# Altium PCB PowerDistribution.PcbDoc (part 3 of 3)
Units mm, origin at the board's own origin, x right, y up, seen from the top; angles counter-clockwise.
Board outline 120 x 100 mm, 4 copper layers (Component Side, Ground, Power, Solder Side), stack 0.844 mm thick; 193 components, 120 nets, 734 pads, 6 vias.
Unrouted connection lines stored in the file: 508.
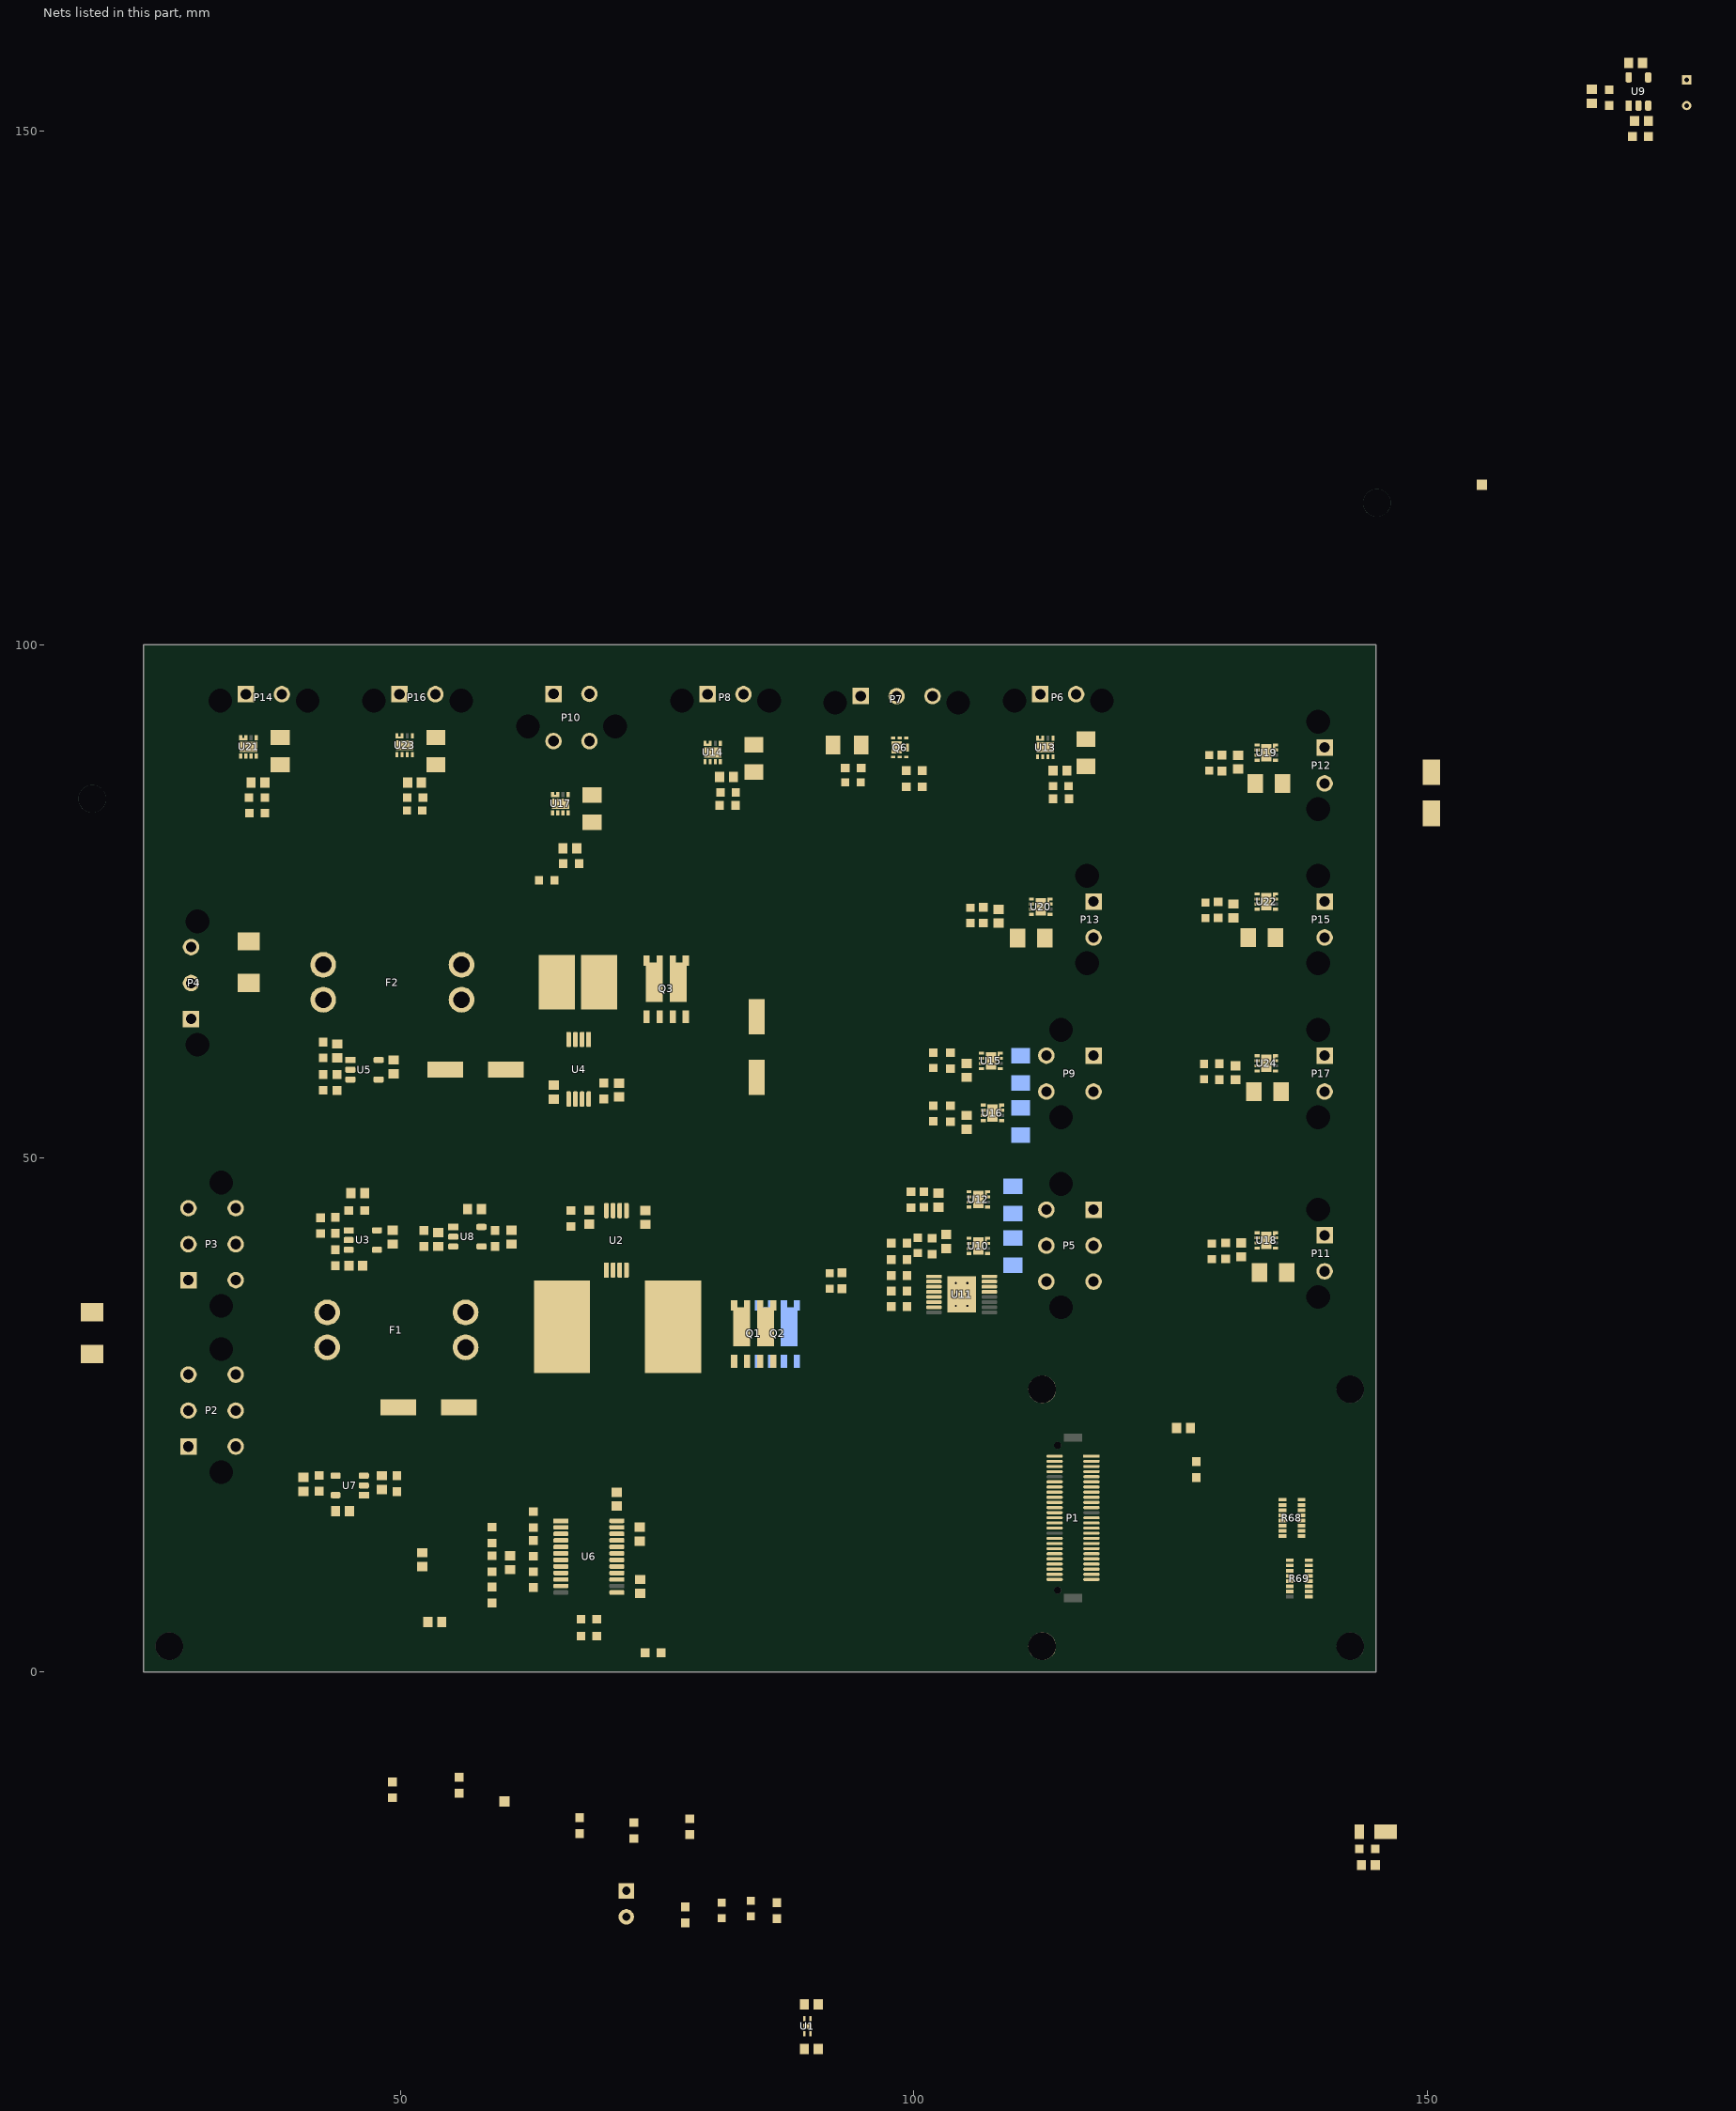
[diagram p2: the nets of this part, all layers, seen from the top]

## Part data (continued)
U11: library part "IC DVR HIGH-SIDE 1CH POWERSSO-16", "IC, High Side Drive, 4V - 28V, 24A, 40 mOhm", Manufacturer 1=STMicroelectronics, Manufacturer Part Number 1=VN7040AJTR, Max Operating Temperature=150°C, Max Output Current=24A, Min Operating Temperature=-40°C, Supplier Part Number 1=497-15853-1-ND, ComponentLink1Description=http://www.mouser.com/ds/2/389/vn7040aj-957413.pdf, ComponentLink1URL=http://www.mouser.com/ds/2/389/vn7040aj-957413.pdf, ComponentLink2Description=http://www.st.com/content/ccc/resource/technical/document/datasheet/5f/e6/42/6c/dc/d9/4c/65/DM00157100.pdf/files/DM00157100.pdf/jcr:content/translations/en.DM00157100.pdf, ComponentLink2URL=http://www.st.com/content/ccc/resource/technical/document/datasheet/5f/e6/42/6c/dc/d9/4c/65/DM00157100.pdf/files/DM00157100.pdf/jcr:content/translations/en.DM00157100.pdf, Description 1="ABD VIPOWER", Fault Protection="Over Voltage,Over Temperature", Interface=On/Off, Lead Free="Lead Free", Number of Outputs=1, Number of Pins=16, Packaging="Tape and Reel", Pricing 1="1=1.82, 10=1.638, 100=1.3165, 500=1.0816, 1000=0.8962 (USD)", Stock 1=1308, Supplier 1=Digi-Key

## Free pads (board coordinates)
  round 2.7 hole 2.7: ""(20,85) ""(27.5,2.5) ""(112.5,2.5) ""(112.5,27.5) ""(142.5,2.5) ""(142.5,27.5) ""(145.078,113.809)

## Via types
v1: diameter 0.5, hole 0.2, Component Side to Solder Side, 6 vias

## Nets (pads, with @x,y where several pads share a name; then routed paths per layer and width w, separated by ;. In a path a pad name is that pad's centre, name@x,y a point inside that pad or via, vN(x,y) a via of type N, cw(c..) or ccw(c..) an arc to the next point about the centre after c; other vN are vias at no path point)
3V3: C1.1 C32.1 C33.1 C34.1 C36.1 C37.1 C38.1 C39.1 C40.1 C41.1 C42.1 C43.1 C44.1 C45.1 C46.1 P1.40 P1.41 P1.42 P1.43 P1.44 P1.45 R17.1 R19.1 R33.1 TP1.1 U1.3 U1.4 U10.3 U12.3 U13.3 U14.3 U15.3 U16.3 U17.3 U18.3 U19.3 U20.3 U21.3 U22.3 U23.3 U24.3
AUX_BAT_IN: D2.1 F2.1 F2.3 P4.1 P4.2 R11.1
AUX_FUSED: C21.1 Q3.7 Q3.8 R9.2 R21.1 TP4.1 U4.3 U6.23
BMS_CARRIER_PWR: LED11.1 P10.1 P10.3 R52.1 U17.7 U17.8
CHARGER_INTERFACE: LED12.1 P11.1 R54.1 U18.7 U18.8
DCDC_UNFUSED: D1.1 F1.1 F1.3 P2.5 P2.6 P3.5 P3.6 R5.1
DRV_CTRL_PWR: LED3.1 P5.5 R31.1 U10.7 U10.8
DRV_DISP_PWR: LED5.1 P5.4 R39.1 U12.7 U12.8
FRONT_LIGHTS_PWR: LED4.1 P5.6 U11.13 U11.14 U11.15 U11.16
FRONT_SOLAR_SENSE: LED13.1 P12.1 R55.1 U19.7 U19.8
GND: C1.2 C2.2 C3.2 C4.2 C5.2 C6.2 C7.2 C8.2 C9.2 C10.2 C11.2 C12.2 C13.2 C14.2 C15.2 C17.2 C18.2 C19.2 C20.2 C21.2 C22.2 C23.2 C24.2 C25.2 C26.2 C27.2 C28.2 C29.2 C30.2 C31.2 C32.2 C33.2 C34.2 C35.2 C36.2 C37.2 C38.2 C39.2 C40.2 C41.2 C42.2 C43.2 C44.2 C45.2 C46.2 D1.2 D2.2 JP1.1 LED1.2 LED2.2 P1.1 P1.2 P1.3 P1.4 P1.26 P1.27 P1.28 P1.29 P2.2 P2.3 P3.2 P3.3 P4.3 P5.1 P5.2 P5.3 P6.2 P7.3 P8.2 P9.1 P9.3 P10.2 P10.4 P11.2 P12.2 P13.2 P14.2 P15.2 P16.2 P17.2 pad.@112.5,27.5 Q6.4 Q6.8 R8.2 R14.2 R20.2 R23.2 R24.2 R27.2 R28.2 R30.2 R35.2 R36.2 R37.2 R38.2 R47.2 R68.9 R68.10 R68.11 R68.12 R68.13 R68.14 R68.15 R68.16 R69.9 R69.10 R69.11 R69.12 R69.13 R69.14 R69.15 R69.16 U1.2 U1.5 U2.1 U2.4 U2.6 U2.7 U3.2 U4.1 U4.4 U4.6 U4.7 U5.2 U6.8 U6.9 U6.13 U6.16 U6.17 U6.22 U7.2 U8.2 U9.2 U10.4 U11.4 U12.4 U13.4 U14.4 U15.4 U16.4 U17.4 U18.4 U19.4 U20.4 U21.4 U22.4 U23.4 U24.4
LDO_3V: C2.1 C4.1 C6.1 C10.1 C12.1 C23.1 C24.1 C29.1 P2.1 P3.1 pad.@112.5,2.5 RT1.1 TP2.1 U1.1 U2.5 U3.5 U4.5 U5.5 U7.5 U8.5 U9.5
LED_GND: JP1.2 R32.2 R34.2 R40.2 R42.2 R46.2 R49.2 R51.2 R53.2 R56.2 R57.2 R59.2 R62.2 R63.2 R66.2 R67.2
MOTOR_INTERFACE_EN: LED6.1 P6.1 R41.1 U13.7 U13.8
NetC3_1: C3.1 F1.2 F1.4 R3.1 U2.2
NetC7_1: C7.1 R5.2 R7.1 U3.3
NetC9_1: C9.1 F2.2 F2.4 R9.1 U4.2
NetC13_1: C13.1 R11.2 R13.1 U5.3
NetC16_2: C16.2 D3.2 Q3.2 Q3.4 R15.1 TP7.TP
NetC22_1: C22.1 R21.2 R22.1 U6.6
NetC25_1: C25.1 P2.4 R27.1 U7.3
NetC26_1: C26.1 P3.4 R28.1 U8.3
NetC30_1: C30.1 R30.1 RT1.2 U9.3
NetD4_1: D4.1 LED7.2 P7.2 Q6.1 Q6.2 Q6.5 Q6.6 Q6.7
NetLED1_1: LED1.1 R1.2
NetLED2_1: LED2.1 R2.2
NetLED3_2: LED3.2 R32.1
NetLED4_2: LED4.2 R34.1
NetLED5_2: LED5.2 R40.1
NetLED6_2: LED6.2 R42.1
NetLED7_1: LED7.1 R43.2
NetLED8_2: LED8.2 R46.1
NetLED9_2: LED9.2 R49.1
NetLED10_2: LED10.2 R51.1
NetLED11_2: LED11.2 R53.1
NetLED12_2: LED12.2 R56.1
NetLED13_2: LED13.2 R57.1
NetLED14_2: LED14.2 R59.1
NetLED15_2: LED15.2 R62.1
NetLED16_2: LED16.2 R63.1
NetLED17_2: LED17.2 R66.1
NetLED18_2: LED18.2 R67.1
NetQ6_3: Q6.3 R45.1
NetR4_1: R4.1 U2.8
NetR6_1: R6.1 U3.1 U3.4
NetR7_2: R7.2 R8.1
NetR10_1: R10.1 U4.8
NetR12_1: R12.1 U5.1 U5.4
NetR13_2: R13.2 R14.1
NetR16_2: R16.2 R18.1 U6.4
NetR18_2: R18.2 R20.1 U6.5
NetR22_2: R22.2 R23.1 U6.7
NetR24_1: R24.1 U6.3
NetR25_1: R25.1 U7.1 U7.4
NetR26_1: R26.1 U8.1 U8.4
NetR29_1: R29.1 U9.1 U9.4
NetR31_2: R31.2 U10.5
NetR33_2: R33.2 U11.2
NetR35_1: R35.1 U11.7
NetR36_1: R36.1 U11.3
NetR37_1: R37.1 U11.5
NetR38_1: R38.1 U11.6
NetR39_2: R39.2 U12.5
NetR41_2: R41.2 U13.5
NetR44_2: R44.2 U14.5
NetR45_2: R45.2 R47.1
NetR48_2: R48.2 U15.5
NetR50_2: R50.2 U16.5
NetR52_2: R52.2 U17.5
NetR54_2: R54.2 U18.5
NetR55_2: R55.2 U19.5
NetR58_2: R58.2 U20.5
NetR60_2: R60.2 U21.5
NetR61_2: R61.2 U22.5
NetR64_2: R64.2 U23.5
NetR65_2: R65.2 U24.5
NetU16_2: U16.2
PA0_DCDC_VSENSE: C8.1 P1.25 R6.2
PA1_AUX_VSENSE: C14.1 P1.24 R12.2
PA2_DCDC_ISENSE: C5.1 P1.23 R4.2
PA3_AUX_ISENSE: C11.1 P1.22 R10.2
PA4/DCDC1_TEMP: C28.1 P1.21 R25.2
PA5/DCDC2_TEMP: C27.1 P1.20 R26.2
PA6/BOARD_TEMP: C31.1 P1.19 R29.2
PA7_MOTOR_INTERFACE_EN: P1.18 R69.2 U13.2
PA8/S\H\D\N\: P1.7 U6.2
PA9_V\A\L\I\D\2\: P1.6 R19.2 U6.11
PA10_V\A\L\I\D\1\: P1.5 R17.2 U6.10
PA15/LED_RED: P1.39
PB0_BMS_CARRIER_EN: P1.17 R69.1 U17.2
PB1_UNPROT_SPARE1_EN: P1.16 R68.8 U22.2
PB2_FRONT_LIGHTS_EN: P1.15 R68.7 U11.1
PB3/LED_GREEN: P1.38
PB4/LED_BLUE: P1.37
PB5_CHARGER_EN: P1.36 R69.3 U18.2
PB6_PROT_SPARE1_EN: P1.34 R69.4 U21.2
PB7_PROT_SPARE2_EN: P1.33 R69.5 U23.2
PB8/EN: P1.32 R69.6 U6.1
PB9_PJB_FAN_PWM: P1.31
PB10_DRV_DISP_EN: P1.14 R68.6 U12.2
PB11_DRV_CTRL_EN: P1.13 R68.5 U10.2
PB12_REAR_CAMERA_EN: P1.11 R68.4
PB13_SOLAR_SENSE_EN: P1.10 R68.3 U19.2 U20.2
PB14_TELEMETRY_EN: P1.9 R68.2 U15.2
PB15_REAR_LIGHTS_EN: P1.8 R68.1 U14.2
PC13_UNPROT_SPARE2_EN: P1.30 R69.7 U24.2
PROT_12V: C16.1 C18.1 C19.1 C35.1 D4.2 P1.47 P1.48 P1.49 P1.50 P7.1 Q1.5 Q1.6 Q2.5 Q2.6 Q3.5 Q3.6 R1.1 R43.1 TP6.1 U6.15 U10.1 U10.9 U14.1 U14.9 U15.1 U15.9 U17.1 U17.9 U21.1 U21.9 U23.1 U23.9
PROT_SPARE1_PWR: LED15.1 P14.1 R60.1 U21.7 U21.8
PROT_SPARE2_PWR: LED17.1 P16.1 R64.1 U23.7 U23.8
REAR_CAMERA_PWR: LED10.1 P9.4 R50.1 U16.7 U16.8
REAR_LIGHTS_PWR: LED8.1 P8.1 R44.1 U14.7 U14.8
REAR_SOLAR_SENSE: LED14.1 P13.1 R58.1 U20.7 U20.8
TELEMETRY_PWR: LED9.1 P9.2 R48.1 U15.7 U15.8
UNPROT_12V: C20.1 Q1.7 Q1.8 Q2.7 Q2.8 R2.1 R3.2 R16.1 TP3.1 U2.3 U6.24 U11.17 U12.1 U12.9 U13.1 U13.9 U16.1 U16.9 U18.1 U18.9 U19.1 U19.9 U20.1 U20.9 U22.1 U22.9 U24.1 U24.9
  other v1: 104.1,35.65 105.2,35.65 104.1,36.75 105.2,36.75 104.1,37.85 105.2,37.85
UNPROT_SPARE1_PWR: LED16.1 P15.1 R61.1 U22.7 U22.8
UNPROT_SPARE2_PWR: LED18.1 P17.1 R65.1 U24.7 U24.8
VG1: Q1.2 Q1.4 Q2.2 Q2.4 TP5.TP U6.20
VG2: D3.1 R15.2 U6.18
VS1: C15.1 Q1.1 Q1.3 Q2.1 Q2.3 U6.21
VS2: C17.1 Q3.1 Q3.3 U6.19
pads on no net: P1. P1.12 P1.35 P1.46 P2. P3. P4. P5. P6. P7. P8. P9. P10. P11. P12. P13. P14. P15. P16. P17. R69.8 U6.12 U6.14 U10.6 U11.8 U11.9 U11.10 U11.11 U11.12 U12.6 U13.6 U14.6 U15.6 U16.6 U17.6 U18.6 U19.6 U20.6 U21.6 U22.6 U23.6 U24.6

## Keep-outs
Keep-Out Layer:
  lines w1: 25,0 25,75

## Silkscreen, mask and mechanical layers (free items; w line width, h text height)
Top Overlay:
  lines w0.254: 109.389,0.635 144.342,0.635 144.342,30 109.389,30 109.389,0.635
  text "AUX IN" at 27.14,58.609 h0.8
  text "DCDC 2 IN" at 27.017,49.491 h0.8
  text "DCDC 1 IN" at 27.271,16.751 h0.8
  text "DCDC IN" at 71.293,-3 h0.8
  text "MSXII POWER DISTRIBUTION REV 2.1" at 42,-5 h0.8
  text "UNPROTECTED / +12V" at 106,-15.5 h0.8
Bottom Overlay:
  text "GND" at 32.378,68.715 h0.8
  text "AUX BAT / +12V" at 35.598,64.651 h0.8
  text "NC" at 101.717,42.032 h0.8
  text "3V / OUT" at 42.348,18.761 h0.8 r180